# Altium PCB STPMXX.PcbDoc
Units mm, origin at the board's own origin, x right, y up, seen from the top; angles counter-clockwise.
Board outline 30.33 x 21.1 mm, 4 copper layers (Top Layer, Internal Plane 1, Internal Plane 2, Bottom Layer); 27 components, 24 nets, 84 pads, 14 vias.
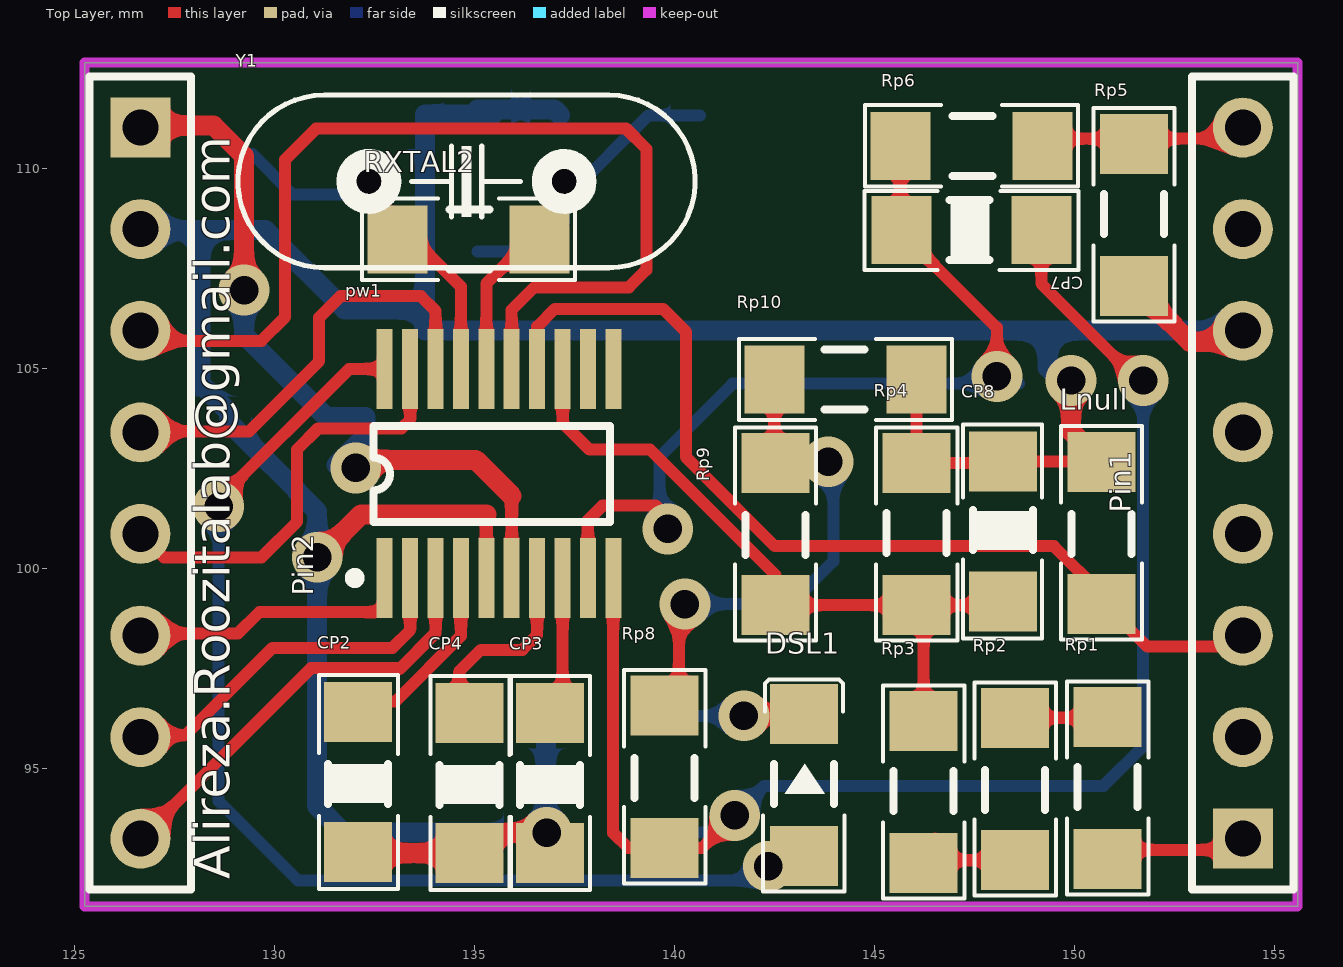
[diagram p0: Top Layer view]
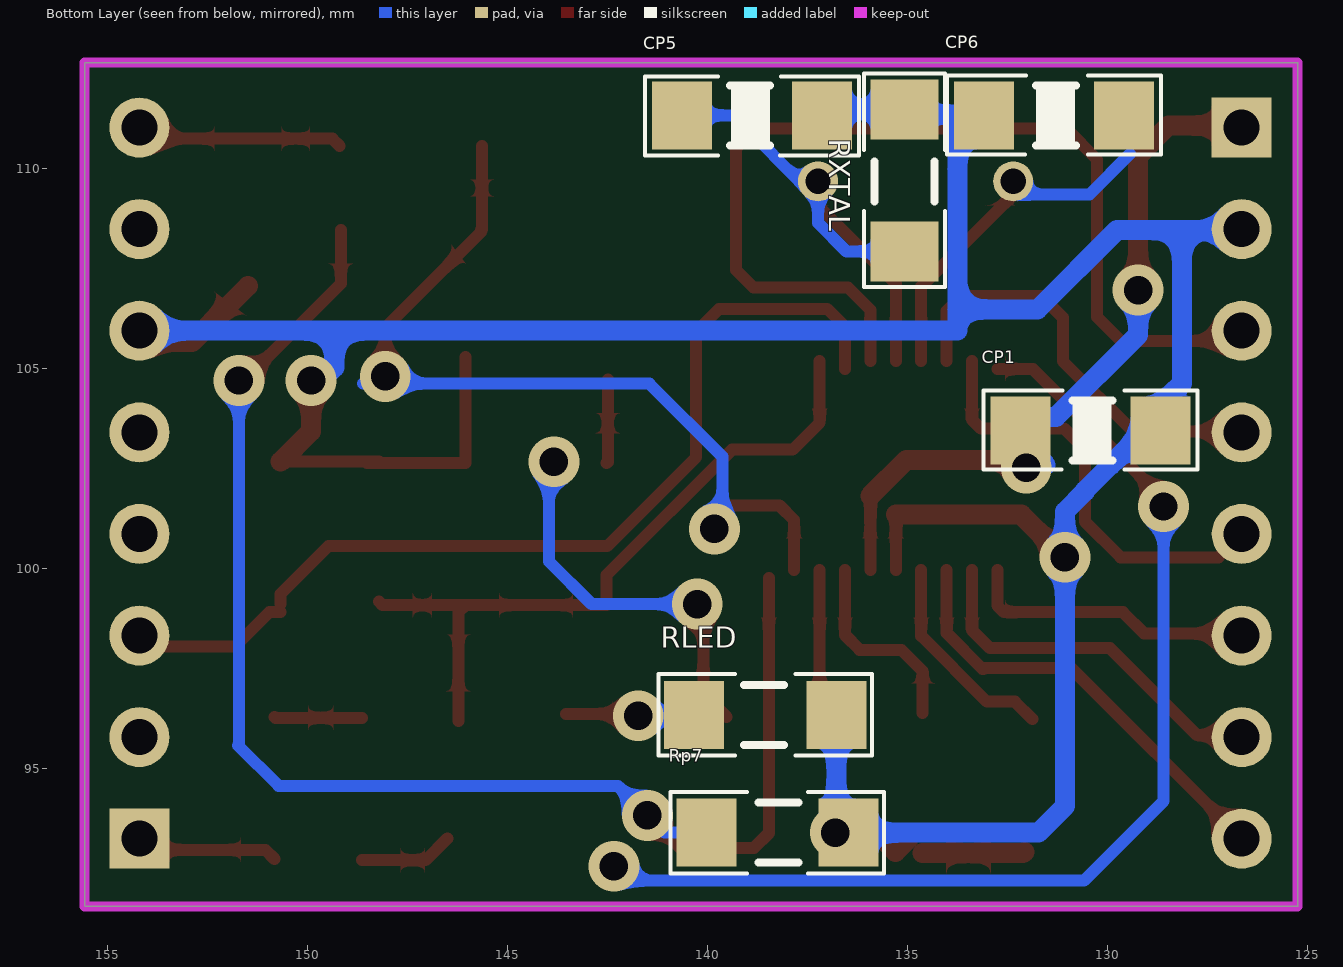
[diagram p1: Bottom Layer view, seen from below]
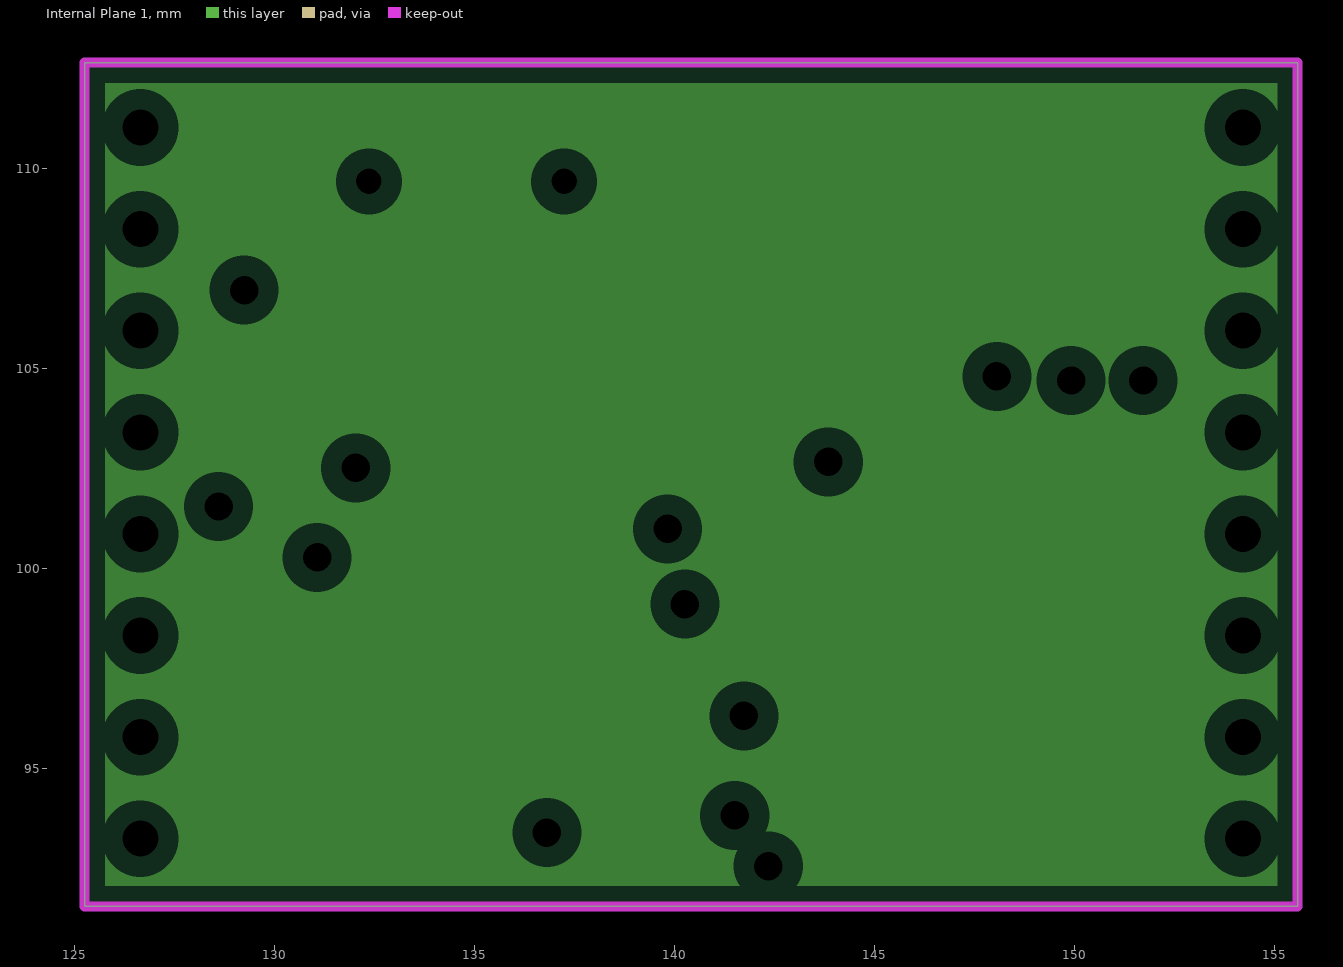
[diagram p2: Internal Plane 1, clearances drawn from the general rule]
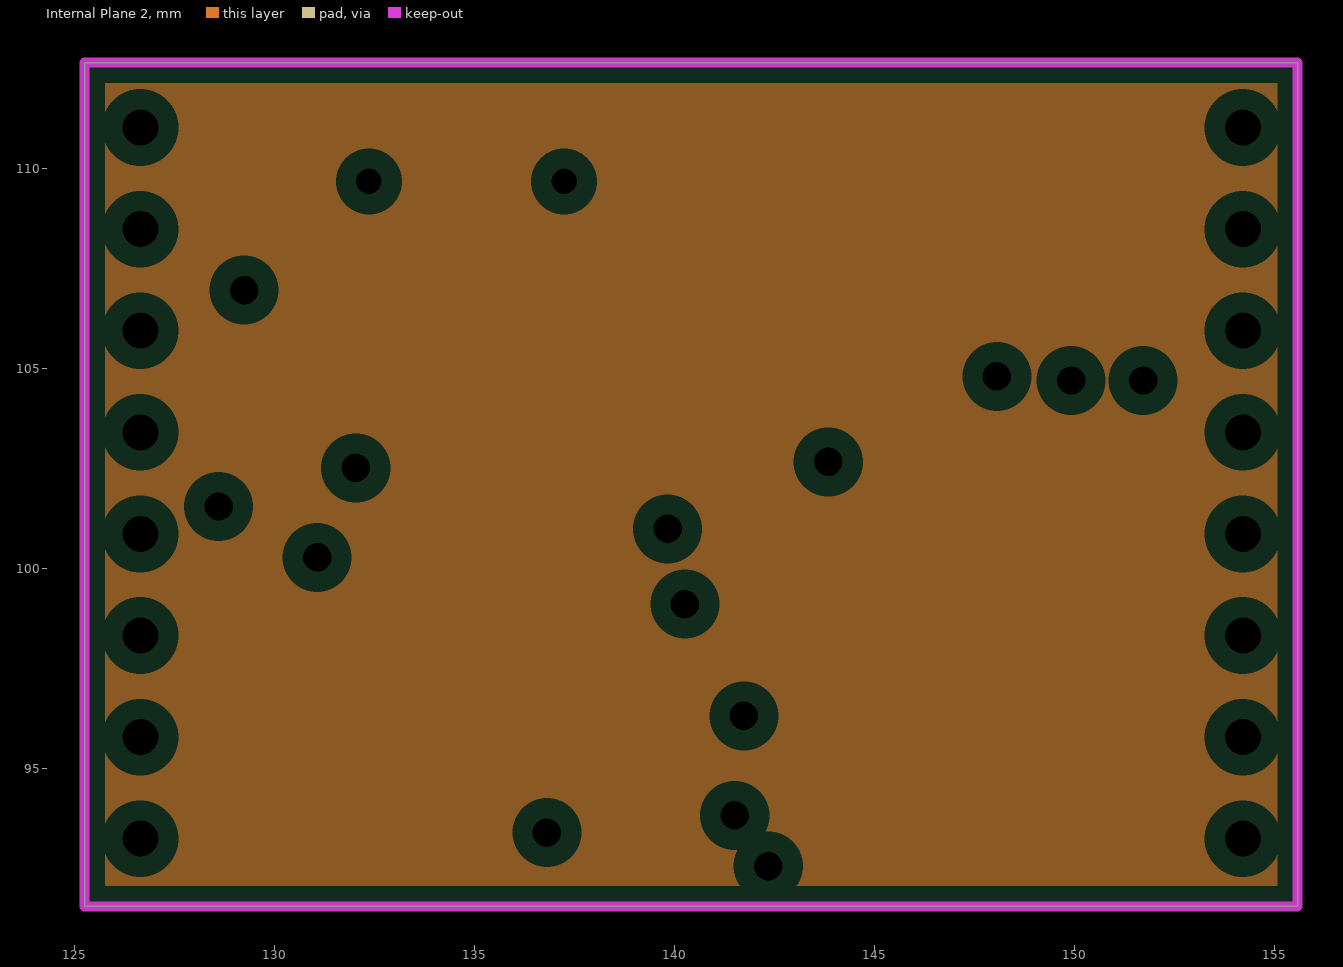
[diagram p3: Internal Plane 2, clearances drawn from the general rule]
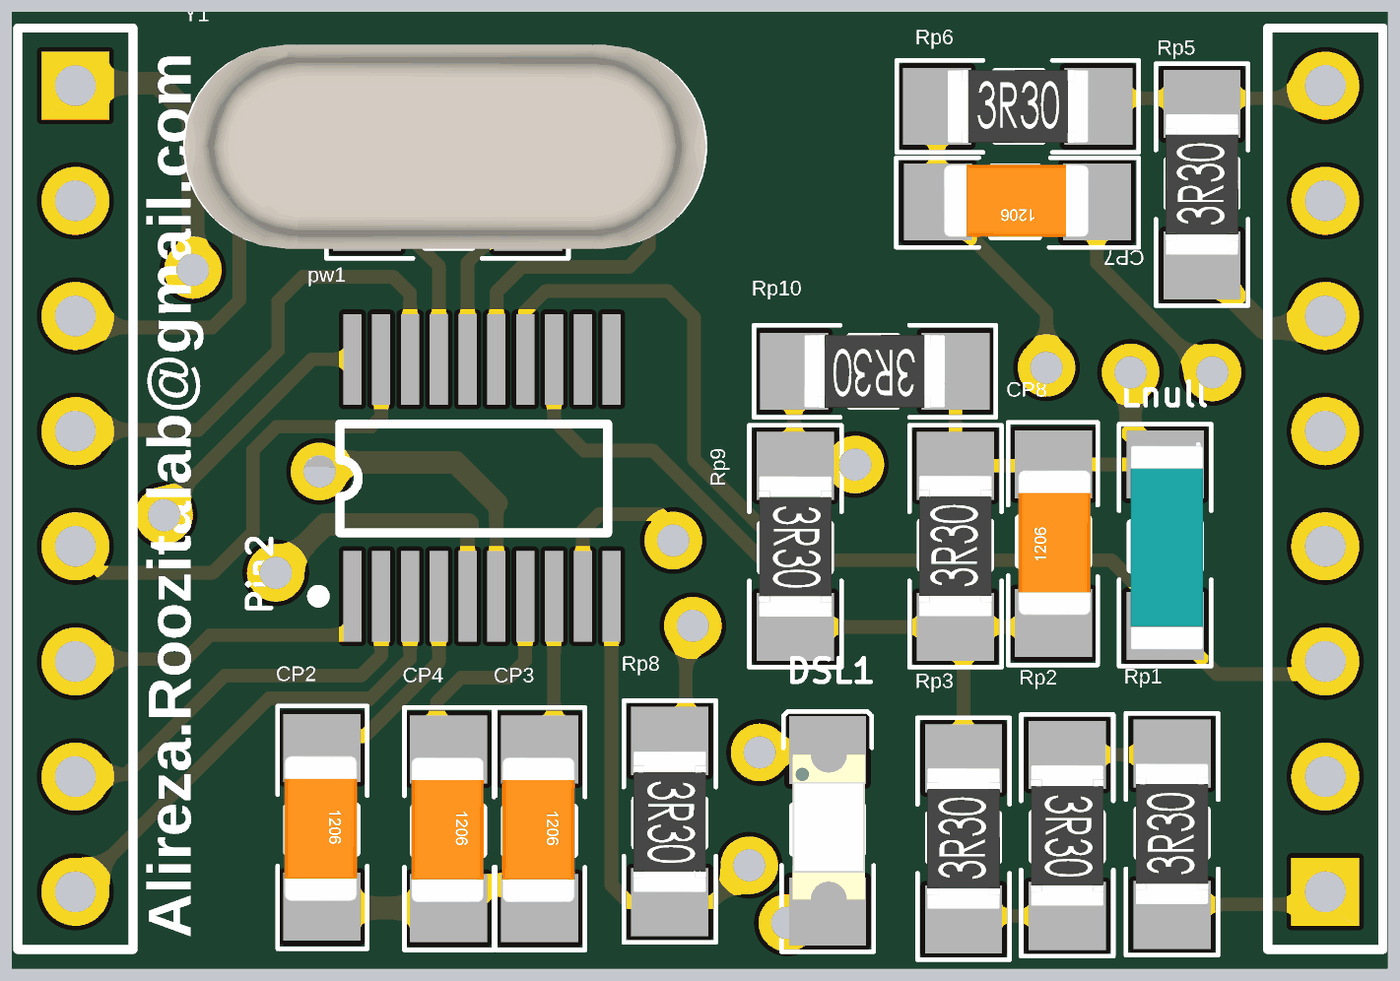
[diagram p4: 3D render of the assembled board from above, using the file's embedded part models]
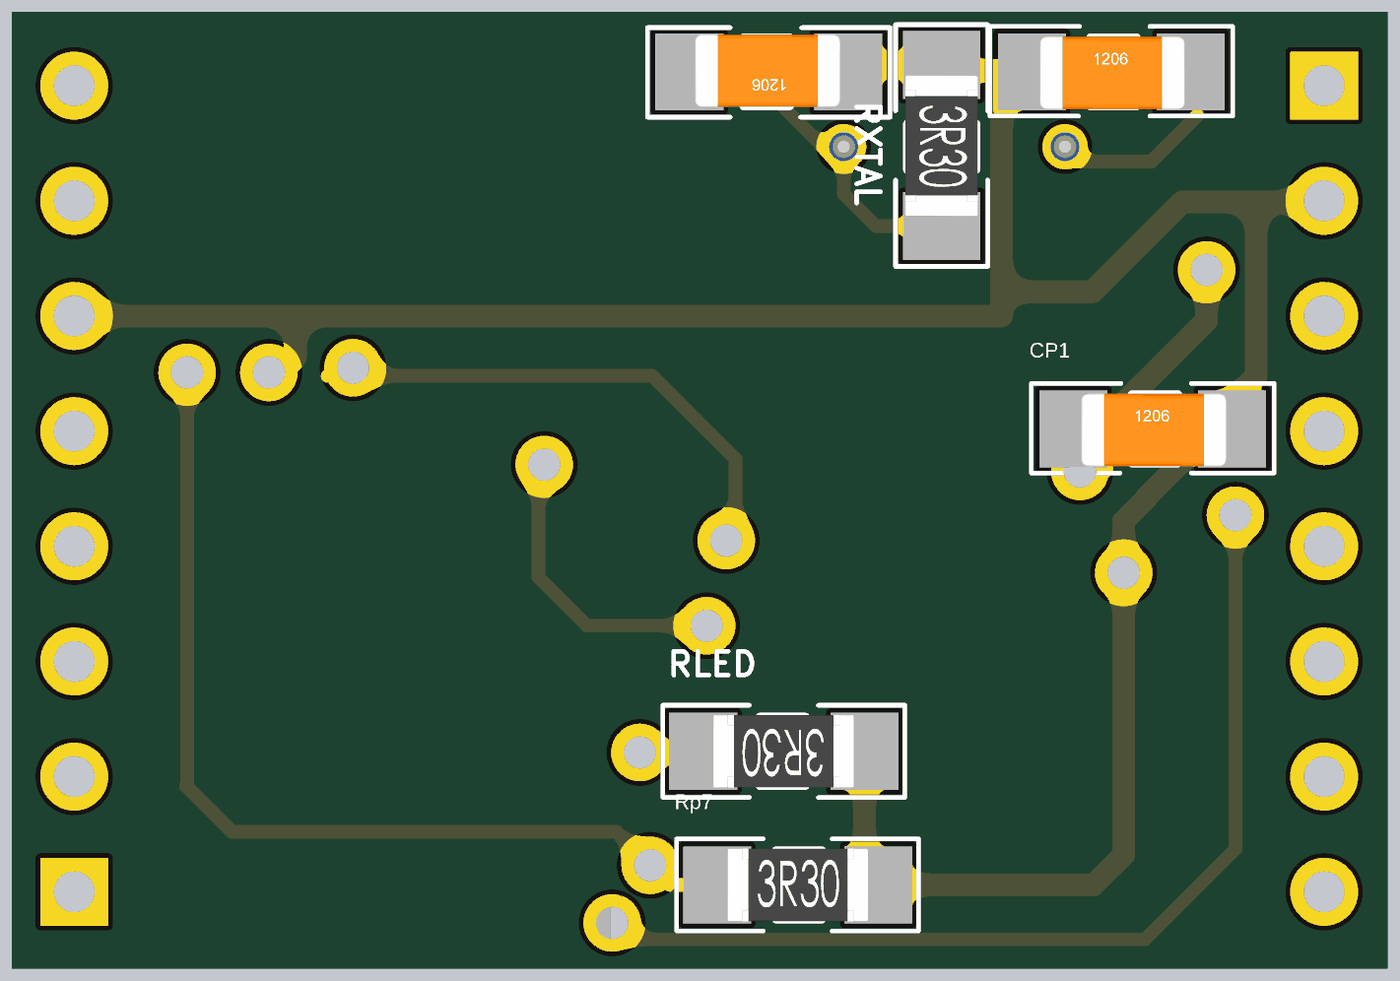
[diagram p5: 3D render of the assembled board from below, using the file's embedded part models]

## Layer stack, top to bottom
Top Solder: solder mask 0.0102, Solder Resist, Dk 3.5
Top Layer: signal copper 0.0356
Dielectric1: dielectric 0.32, FR-4, Dk 4.8
Internal Plane 1: plane copper 0.0356
Dielectric2: dielectric 0.32, FR-4, Dk 4.8
Internal Plane 2: plane copper 0.0356
Dielectric3: dielectric 0.32, FR-4, Dk 4.8
Bottom Layer: signal copper 0.0356
Bottom Solder: solder mask 0.0102, Solder Resist, Dk 3.5

## Board outline
125.247,91.55 125.247,112.649 155.575,112.649 155.575,91.55

## Design rules (kind name [scope] priority, off if disabled: settings)
Clearance [All] p1: gap=0.2 ignorepadtopadclearanceinfootprint=FALSE
ComponentClearance [All] p1: gap=0.01 collisioncheckmode=3 verticalgap=0.01 showdistances=FALSE
PlaneClearance [All] p1: clearance=0.508
PlaneConnect [All] p1: planeconnectstyle=Relief reliefexpansion=0.508 reliefentries=4 reliefconductorwidth=0.254 reliefairgap=0.254
PolygonConnect [All] p1: connectstyle=Relief reliefconductorwidth=0.254 reliefentries=4 polygonreliefangle="90 Angle" airgapwidth=0.254
RoutingVias [All] p1: holewidth=0.6 width=1 viastyle="Through Hole" minholewidth=0.711 minwidth=1.27 maxholewidth=0.711 maxwidth=1.27
SilkToSolderMaskClearance SilkscreenOverComponentPads [IsPad] p1: minsilkscreentomaskgap=0.254 clearancetoexposedcopper=TRUE
SolderMaskExpansion [All] p1: expansion=0.102
Width [All] p1: maxlimit=10 minlimit=0.2 preferedwidth=0.2 minimp=50.000000 maximp=50.000000 favimp=50.000000
26 further rules are at their usual default settings.

## Components (designator, comment, footprint, x,y, rotation, side; value= is the part's Value field where it differs from the comment)
CP1 "Cap" "CAP 1206 (3216X08L)" 131.674,103.454 r180 bottom value=1u
CP2 "Cap" "CAP 1206 (3216X08L)" 132.08,95.913 r270 top value=1u
CP3 "Cap" "CAP 1206 (3216X08L)" 136.881,95.885 r270 top value=1u
CP4 "Cap" "CAP 1206 (3216X08L)" 134.874,95.885 r270 top value=1u
CP5 "Cap" "CAP 1206 (3216X08L)" 137.64,111.328 r0 bottom value=15pf
CP6 "Cap" "CAP 1206 (3216X08L)" 132.588,111.328 r180 bottom value=15pf
CP7 "Cap" "CAP 1206 (3216X08L)" 148.666,108.458 r180 top value=10nf
CP8 "Cap" "CAP 1206 (3216X08L)" 148.209,99.67 r90 top value=22nf
DSL1 "QTLP650C-R" led-1206 143.256,94.62 r90 top value=RED
Lnull "Inductor" INDUCTOR-1206 150.673,100.834 r270 top value=100uH
Pin1 "Header 8" HDR1X8 154.203,93.243 r90 top
Pin2 "Header 8" HDR1X8 126.644,111.023 r270 top
pw1 "stpm01" TSSOP 135.509,102.235 r270 top
RLED "Res2" "RES 1206 (3216X08L)" 137.287,96.342 r0 bottom value="330R 5%"
Rp1 "Res Semi" "RES 1206 (3216X08L)" 150.825,93.243 r90 top value="261k 1%"
Rp2 "Res Semi" "RES 1206 (3216X08L)" 148.514,95.758 r270 top value="261k 1%"
Rp3 "Res Semi" "RES 1206 (3216X08L)" 146.228,93.142 r90 top value="261k 1%"
Rp4 "Res Semi" "RES 1206 (3216X08L)" 146.05,99.593 r90 top value="475R 1%"
Rp5 "Res Semi" "RES 1206 (3216X08L)" 151.486,107.569 r90 top value="3.4R 1%"
Rp6 "Res Semi" "RES 1206 (3216X08L)" 146.152,110.566 r0 top value="1K 1%"
Rp7 "Res Semi" "RES 1206 (3216X08L)" 139.522,93.396 r180 bottom value="1K 1%"
Rp8 "Res Semi" "RES 1206 (3216X08L)" 139.751,96.063 r270 top value="2M 1%"
Rp9 "Res Semi" "RES 1206 (3216X08L)" 142.519,102.133 r270 top value="42.2K 1%"
Rp10 "Res Semi" "RES 1206 (3216X08L)" 145.542,104.724 r180 top value="100R 1%"
RXTAL "Res Semi" "RES 1206 (3216X08L)" 135.077,110.973 r270 bottom value=12K
RXTAL2 "Res Semi" "RES 1206 (3216X08L)" 133.579,108.229 r0 top value=1M
Y1 "XTAL 8mhz" "XTAL SMALL" 134.798,109.677 r180 top

## Footprints (in the part's own frame and the unit in brackets; to place one, negate y for a bottom-side part, rotate by r counter-clockwise, add the part's x,y. Pads: shape width x height; smd on the part's side, far side on the other; paste and mask are expansions set on the pad)
"CAP 1206 (3216X08L)" [mm]
  rect 1.5x1.7 smd: 1(-0.5,0) 2(3,0)
  silkscreen extent -1.43,-0.97 3.93,1, body extent -0.32,-0.83 2.88,0.77, height 1
HDR1X8 [mm] "Connector; Header; 8 Position"
  rect 1.5x1.5 hole 0.9: 1(0,0)
  round 1.5 hole 0.9: 2(2.54,0) 3(5.08,0) 4(7.62,0) 5(10.16,0) 6(12.7,0) 7(15.24,0) 8(17.78,0)
  silkscreen extent -1.27,-1.27 19.05,1.27
INDUCTOR-1206 [mm]
  rect 1.5x1.7 smd: 1(-1.833,0) 2(1.723,0)
  silkscreen extent -2.72,-1.02 2.61,1.02, body extent -2.25,-0.76 2.25,0.84, height 1.6
led-1206 [mm]
  rect 1.5x1.7 smd: 1(-1.808,0.025) 2(1.748,0.025)
  silkscreen extent -2.7,-0.99 2.6,1.04, body extent -1.55,-0.8 1.65,0.8, height 1.1
"RES 1206 (3216X08L)" [mm]
  rect 1.5x1.7 smd: 1(-0.508,0) 2(3.048,0)
  silkscreen extent -1.4,-1.02 3.94,1.02, body extent -0.27,-0.8 2.83,0.8, height 0.55
TSSOP [mm]
  rect 2x0.4 smd: 1(2.473,-2.756) 2(2.473,-2.121) 3(2.473,-1.486) 4(2.473,-0.851) 5(2.473,-0.216) 6(2.473,0.419) 7(2.473,1.054) 8(2.473,1.689) 9(2.473,2.324) 10(2.473,2.959) 11(-2.752,2.959) 12(-2.752,2.324) 13(-2.752,1.689) 14(-2.752,1.054) 15(-2.752,0.419) 16(-2.752,-0.216) 17(-2.752,-0.851) 18(-2.752,-1.486) 19(-2.752,-2.121) 20(-2.752,-2.756)
  silkscreen extent -1.33,-3.63 2.6,2.87
"XTAL SMALL" [mm]
  round 0.8 / inner round 1 / far side round 1 hole 0.635: 1(-2.44,0) 2(2.44,0)
  silkscreen extent -5.71,-2.16 5.71,2.16, body extent -5.75,-2.25 5.75,2.25, height 3.56

## Part data
CP1 CP2 CP3 CP4 CP5 CP6 CP7 CP8: "Capacitor", LatestRevisionDate=17-Jul-2002, LatestRevisionNote="Re-released for DXP Platform.", PackageReference=RAD-0.3, Published=8-Jun-2000, Publisher="Altium Limited"
DSL1: library part LED0_1, "Typical INFRARED GaAs LED", LatestRevisionDate=08-Jul-2005, LatestRevisionNote="Mech Layer 1 removed.", PackageReference=LED-0, Published=8-Jun-2000, Publisher="Altium Limited"
Lnull: library part Inductor_1, Code_IEC=1005, Code_JEITA=0402, LatestRevisionDate=17-Jul-2002, LatestRevisionNote="Re-released for DXP Platform.", PackageReference=0402-A, Published=8-Jun-2000, Publisher="Altium Limited"
Pin1 Pin2: "Header, 8-Pin", LatestRevisionDate=17-Jul-2002, LatestRevisionNote="Re-released for DXP Platform.", Publisher="Altium Limited"
RLED: library part Res2_1, "Resistor", LatestRevisionDate=17-Jul-2002, LatestRevisionNote="Re-released for DXP Platform.", PackageReference=AXIAL-0.4, Published=8-Jun-2000, Publisher="Altium Limited"
Rp1 Rp2 Rp3 Rp4 Rp5 Rp6 Rp7 Rp8 Rp9 Rp10 RXTAL RXTAL2: "Semiconductor Resistor", LatestRevisionDate=17-Jul-2002, LatestRevisionNote="Re-released for DXP Platform.", PackageReference=AXIAL-0.5, Published=8-Jun-2000, Publisher="Altium Limited"
Y1: library part XTAL, "Crystal Oscillator", LatestRevisionDate=17-Jul-2002, LatestRevisionNote="Re-released for DXP Platform.", PackageReference=R38, Published=8-Jun-2000, Publisher="Altium Limited"

## Via types
v1: diameter 1.27, hole 0.711, Top Layer to Bottom Layer, 14 vias

## Nets (pads, with @x,y where several pads share a name; then routed paths per layer and width w, separated by ;. In a path a pad name is that pad's centre, name@x,y a point inside that pad or via, vN(x,y) a via of type N, cw(c..) or ccw(c..) an arc to the next point about the centre after c; other vN are vias at no path point)
+5V: CP1.1 Pin2.1 pw1.6 | length 19.7
  Top Layer w0.3: pw1.6@135.928,99.965 135.928,101.816
  Top Layer w0.5: Pin2.1@126.416,111.074 128.473,111.074 129.235,110.312 v1(129.235,106.959) ; v1(132.029,102.514) 132.232,102.718 135.026,102.718 135.928,101.816
  Bottom Layer w0.5: v1(129.235,106.959) 129.235,105.842 131.293,103.784 132.275,103.784 132.275,103.319 131.547,102.591 131.623,102.514 v1(132.029,102.514)
GND: CP1.2 CP2.2 CP3.2 CP4.2 CP5.1 CP6.1 CP8.2 Lnull.1 Pin1.6 Pin2.2 pw1.5 RLED.1 Rp4.2 Rp5.1 Rp7.2 Rp10.1 RXTAL.1 | length 88.5
  Top Layer w0.3: pw1.5@135.293,99.965 135.293,101.346 ; Rp10.1@146.05,105.283 Rp10.1 Rp4.2 CP8.2@148.514,102.641 ; CP8.2 150.67,102.67 Lnull.1
  Top Layer w0.5: v1@131.077,100.266 132.156,101.346 135.293,101.346 ; CP2.2 132.108,92.885 CP4.2@134.62,92.885 ; CP4.2@134.975,93.24 135.302,92.913 135.785,93.396 v1(136.804,93.396) ; v1(149.911,104.699) 149.911,103.429 Lnull.1@150.67,102.67 ; Rp5.1 152.883,105.664 Pin1.6@154.203,105.664
  Bottom Layer w0.5: Pin2.2@126.746,108.509 126.797,108.458 128.143,108.458 ; 133.875,111.303 133.926,111.354 ; RXTAL.1 136.987,111.481 CP5.1 ; RXTAL.1@135.23,111.125 135.458,111.354 133.926,111.354 ; RLED.1 136.779,93.421 v1(136.804,93.396) Rp7.2 131.724,93.396 131.064,94.056 v1(131.064,100.279) 131.064,101.426 130.562,101.929 130.562,101.95 128.854,103.657 128.854,103.911 128.143,104.623 128.143,108.458 ; v1@149.911,104.445 149.327,105.029 149.327,105.943 ; Pin1.6@154.407,105.664 154.127,105.943 149.327,105.943 ; 128.143,108.458 129.769,108.458 131.75,106.477 133.756,106.477 ; 133.756,106.477 133.756,111.354 133.926,111.354 ; 133.756,106.477 133.756,105.943 149.327,105.943
IN1N: CP7.1 pw1.10 Rp7.1 Rp8.2 | length 37.9
  Top Layer w0.3: pw1.10 138.463,99.757 138.463,93.388 138.836,93.015 Rp8.2 140.691,93.015 v1(141.503,93.828) v1@141.503,93.777 ; CP7.1 149.166,107.12 151.714,104.572 v1(151.714,104.699)
  Bottom Layer w0.3: Rp7.1 141.072,93.396 v1(141.503,93.828) 142.24,94.564 150.724,94.564 151.74,95.58 151.714,95.606 v1(151.714,104.699) 151.714,103.581
IN1P: CP7.2 pw1.9 Rp6.1 | length 22
  Top Layer w0.3: pw1.9@137.833,99.965 137.833,101.206 138.201,101.575 139.522,101.575 v1@139.903,101.194 ; Rp6.1 145.644,108.481 CP7.2 145.666,108.41 148.057,106.02 v1(148.057,104.8)
  Bottom Layer w0.3: v1(139.827,100.99) 139.624,101.194 139.624,102.794 141.453,104.623 v1@148.615,104.623
MON: Pin2.6 pw1.1 | length 7.5
  Top Layer w0.3: Pin2.6@126.416,98.374 129.083,98.374 129.616,98.908 132.588,98.908 132.753,99.073 pw1.1 pw1.1@132.753,99.965
MOP: Pin2.7 pw1.2 | length 9.6
  Top Layer w0.3: Pin2.7@126.416,95.834 127.762,95.834 129.941,98.013 132.942,98.013 133.388,98.459 pw1.2 pw1.2@133.388,99.965
NetCP2_1: CP2.1 pw1.4 | length 5.3
  Top Layer w0.3: CP2.1@131.877,96.233 132.317,96.672 133.016,96.672 134.658,98.315 pw1.4@134.658,99.965
NetCP3_1: CP3.1 pw1.8 | length 3.7
  Top Layer w0.3: CP3.1@136.804,96.413 137.198,96.807 pw1.8@137.198,99.965
NetCP4_1: CP4.1 pw1.7 | length 5
  Top Layer w0.3: CP4.1@134.62,96.385 134.62,97.434 135.153,97.968 136.195,97.968 136.563,98.336 pw1.7@136.563,99.965
NetCP5_2: CP5.2 pw1.16 RXTAL2.2 RXTAL.2 Y1.1 | length 12.4
  Top Layer w0.3: pw1.16@135.293,105.191 135.293,107.124 137.236,109.068 Y1.1@137.236,109.347
  Bottom Layer w0.3: RXTAL.2 136.525,107.925 137.236,108.636 137.236,109.347 137.366,109.347 139.347,111.328 CP5.2
NetCP6_2: CP6.2 pw1.17 RXTAL2.1 Y1.2 | length 8.5
  Top Layer w0.3: Y1.2@132.356,109.347 134.658,107.045 pw1.17@134.658,105.191
  Bottom Layer w0.3: 129.437,110.364 130.454,109.347 Y1.2@132.356,109.347
NetDSL1_1: DSL1.1 pw1.20 | length 28.1
  Top Layer w0.3: v1@128.346,101.752 128.63,101.752 131.865,104.987 pw1.20
  Bottom Layer w0.3: v1(128.6,101.549) 128.6,94.183 130.588,92.196 142.361,92.196 142.342,92.215 v1(142.342,92.558)
NetDSL1_2: DSL1.2 RLED.2 | length 3.3
  Top Layer w0.3: v1(141.732,96.317) 141.778,96.363 DSL1.2@143.536,96.363
  Bottom Layer w0.3: RLED.2 140.386,96.291 140.411,96.317 v1(141.732,96.317)
NetPin1_1: Pin1.1 Rp1.1 | length 3.5
  Top Layer w0.3: Rp1.1 151.054,92.964 Pin1.1@154.203,92.964
NetPin1_8: Pin1.8 Rp5.2 Rp6.2 | length 5.1
  Top Layer w0.3: Rp6.2 149.377,110.744 Pin1.8@154.203,110.744
NetRp1_2: Rp1.2 Rp2.1 | length 2.2
  Top Layer w0.3: Rp2.1@148.641,96.266 150.8,96.266 Rp1.2
NetRp2_2: Rp2.2 Rp3.1 | length 2.4
  Top Layer w0.3: Rp3.1@146.506,93.25 147.046,92.71 Rp2.2@148.641,92.71
NetRp8_1: Rp8.1 Rp9.1 Rp10.2 | length 11.6
  Top Layer w0.3: Rp8.1@139.522,96.291 140.106,96.876 140.106,98.958 v1(140.259,99.111) ; Rp10.2 142.494,102.667 Rp9.1
  Bottom Layer w0.3: v1(140.259,99.111) 142.9,99.111 143.967,100.178 v1@143.967,102.362
  other v1: 143.84,102.667
null: Lnull.2 Pin1.3 pw1.14 | length 24.3
  Top Layer w0.3: pw1.14 136.563,106.047 137.008,106.492 139.71,106.492 140.284,105.918 140.284,102.782 142.507,100.559 149.479,100.559 150.673,99.365 Lnull.2 ; Lnull.2@150.673,98.908 150.952,98.908 151.816,98.044 Pin1.3@154.203,98.044
SCL: Pin2.4 pw1.18 | length 10.2
  Top Layer w0.3: Pin2.4@127.279,103.429 129.362,103.429 131.115,105.181 131.115,106.274 131.648,106.807 133.655,106.807 134.023,106.439 pw1.18@134.023,105.191
SCS: Pin2.8 pw1.3 | length 11.1
  Top Layer w0.3: Pin2.8@126.67,93.269 130.914,97.513 133.075,97.513 133.103,97.485 133.121,97.485 134.023,98.387 pw1.3@134.023,99.965
SDA: Pin2.5 pw1.19 | length 10.9
  Top Layer w0.3: Pin2.5 127.229,100.279 129.671,100.279 130.562,101.17 130.562,102.977 131.084,103.499 133.167,103.499 133.388,103.721 pw1.19 pw1.19@133.388,105.191
SYN: Pin2.3 pw1.15 | length 25.6
  Top Layer w0.3: Pin2.3@126.467,105.689 129.667,105.689 130.259,106.282 130.259,110.219 131.039,110.998 138.786,110.998 139.294,110.49 139.294,107.467 138.854,107.028 136.492,107.028 135.928,106.464 pw1.15@135.928,105.191
VN1P: CP8.1 pw1.13 Rp3.2 Rp4.1 Rp9.2 | length 17.9
  Top Layer w0.3: pw1.13@137.198,105.191 pw1.13 137.198,103.645 137.871,102.972 139.387,102.972 142.519,99.839 Rp9.2 Rp4.1 ; Rp3.2 146.228,98.908 Rp4.1 ; CP8.1 148.125,99.085 Rp4.1
pads on no net: Pin1.2 Pin1.4 Pin1.5 Pin1.7 pw1.11 pw1.12

## Polygon pours and split planes (outlines as drawn)
no net on Internal Plane 1 (split plane): 155.065,92.061 125.758,92.061 125.758,112.139 155.065,112.139
no net on Internal Plane 2 (split plane): 155.065,92.061 125.758,92.061 125.758,112.139 155.065,112.139

## Keep-outs
Keep-Out Layer:
  the board outline again, w0.254

## Silkscreen, mask and mechanical layers (free items; w line width, h text height)
Top Overlay:
  text "Alireza.Roozitalab@gmail.com" at 129.184,92.227 h1.52 r90